# Altium PCB microcontroller.PcbDoc
Units mil, origin at the board's own origin, x right, y up, seen from the top; angles counter-clockwise.
Board outline 1890.03 x 2705.02 mil, 2 copper layers (Top Layer, Bottom Layer); 40 components, 47 nets, 161 pads, 31 vias.
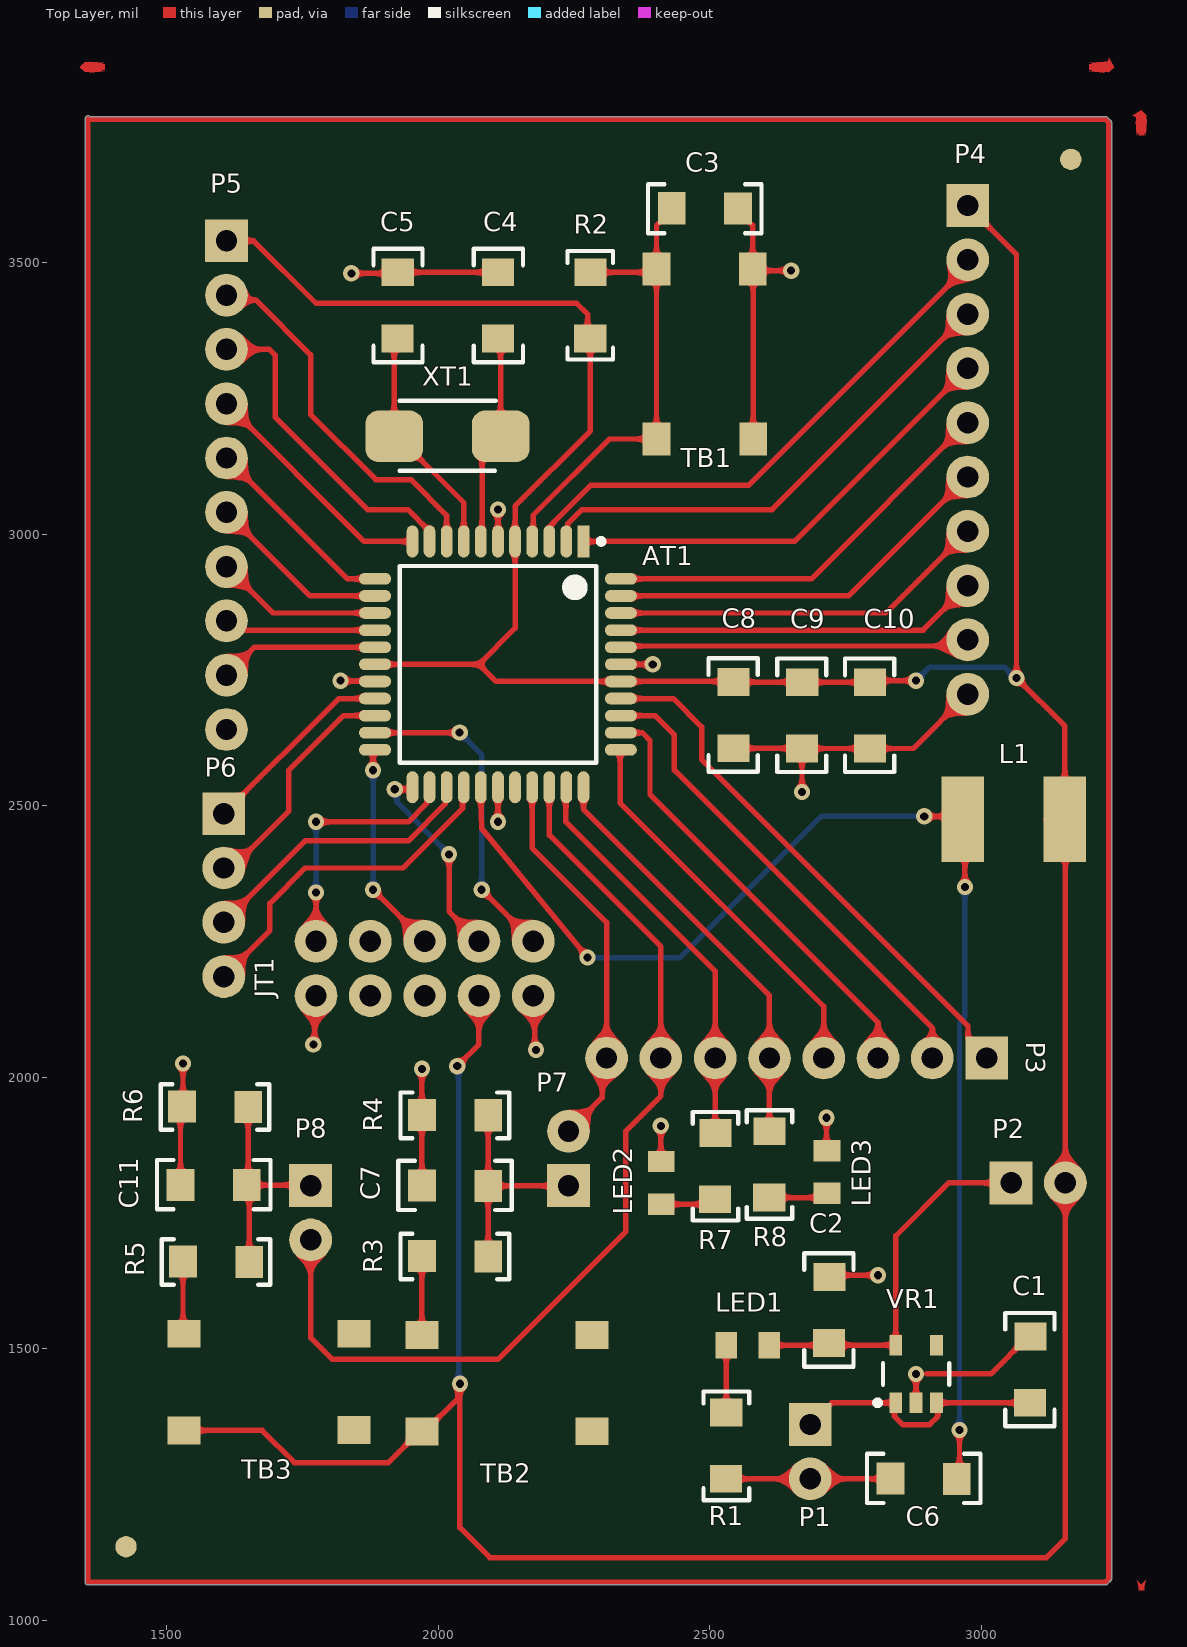
[diagram p0: Top Layer view]
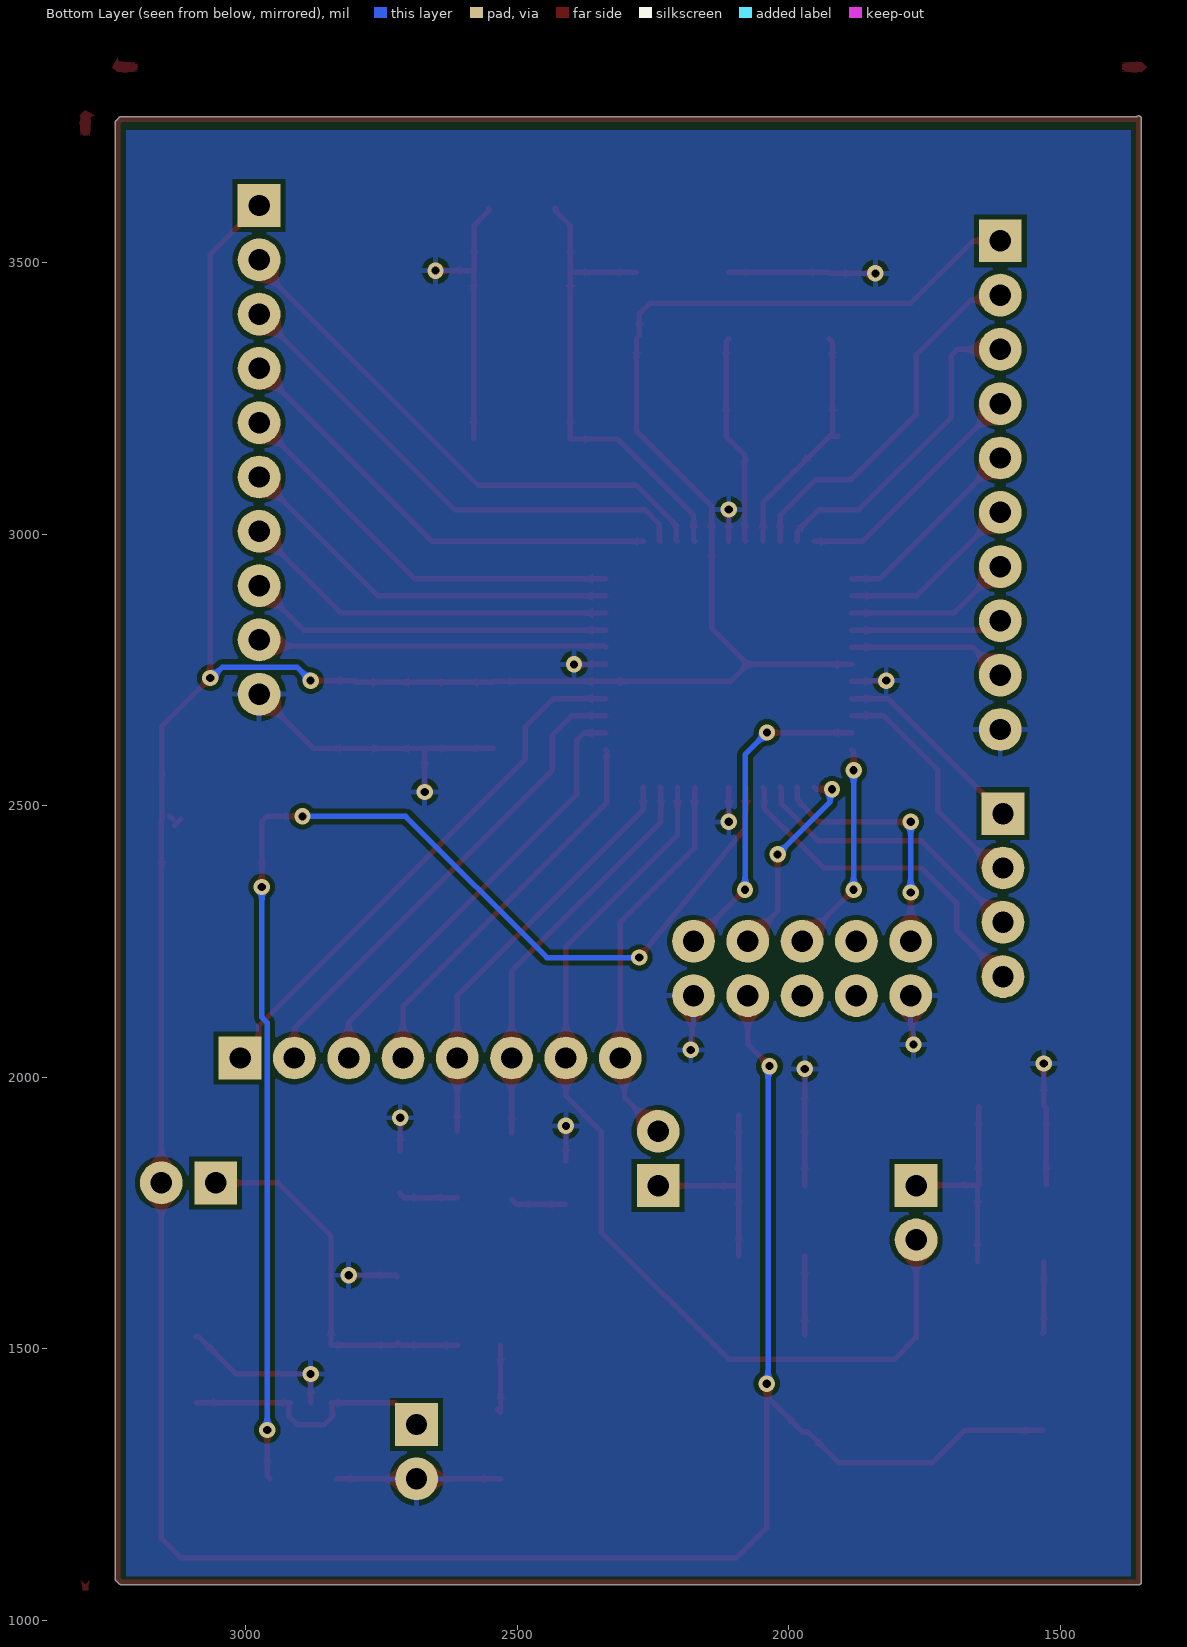
[diagram p1: Bottom Layer view, seen from below]

## Layer stack, top to bottom
Top Solder: solder mask 0.4, Solder Resist, Dk 3.5
Top Layer: signal copper 1.4
Dielectric 1: dielectric 12.6, FR-4, Dk 4.8
Bottom Layer: signal copper 1.4
Bottom Solder: solder mask 0.4, Solder Resist, Dk 3.5

## Board outline
1349.98,1070 1349.98,3765 cw(c1355,3765) 1358.55,3768.54 3229.14,3768.54 cw(c3229.14,3763.53) 3232.71,3767.06 3232.69,3767.08 3238.55,3761.22 3238.53,3761.23 cw(c3235,3757.67) 3240.01,3757.67 3240.01,1075.86 cw(c3235,1075.86) 3238.53,1072.29 3238.55,1072.31 3232.69,1066.45 3232.71,1066.47 cw(c3229.14,1070) 3229.14,1064.98 1355,1064.98 cw(c1355,1070)

## Design rules (kind name [scope] priority, off if disabled: settings)
Clearance [All] p1: gap=9 ignorepadtopadclearanceinfootprint=FALSE
ComponentClearance [All] p1: gap=10 collisioncheckmode=3 verticalgap=9 showdistances=FALSE
HoleToHoleClearance [All] p1: gap=9 allowstackedmicrovias=TRUE
MinimumSolderMaskSliver [All] p1: minsoldermaskwidth=1.5
PolygonConnect [All] p1: connectstyle=Relief reliefconductorwidth=10 reliefentries=4 polygonreliefangle="90 Angle" airgapwidth=10
RoutingVias [All] p1: holewidth=28 width=50 viastyle="Through Hole" minholewidth=28 minwidth=50 maxholewidth=28 maxwidth=50
SilkToSilkClearance [All] p1: silktosilkclearance=9
SilkToSolderMaskClearance [IsText] p1: minsilkscreentomaskgap=9 clearancetoexposedcopper=TRUE
SolderMaskExpansion [All] p1: expansion=4 istentingtop=FALSE
Width [All] p1: maxlimit=25 minlimit=10 preferedwidth=15
25 further rules are at their usual default settings.

## Components (designator, comment, footprint, x,y, rotation, side; value= is the part's Value field where it differs from the comment)
AT1 "ATmega644PA" TQFP-44 2110,2760 r270 top
C1 "1206, capacitor" "1206, capasitor" 3091.48,1544.61 r90 top value=100nF
C2 "1206, capacitor" "1206, capasitor" 2721.48,1654.61 r90 top value=10uF
C3 "1206, capacitor" "1206, capasitor" 2407.35,3601.04 r180 top value=100n
C4 "1206, capacitor" "1206, capasitor" 2108.96,3337.35 r270 top value=10-12p
C5 "1206, capacitor" "1206, capasitor" 1923.96,3337.35 r270 top value=10-12p
C6 "1206, capacitor" "1206, capasitor" 2977.65,1258.96 r0 top value=0
C7 "1206, capacitor" "1206, capasitor" 2114.61,1798.52 r0 top value=1uF
C8 "1206, capacitor" "1206, capasitor" 2545,2750 r90 top value=100n
C9 "1206, capacitor" "1206, capasitor" 2671.48,2749.61 r90 top value=100n
C10 "1206, capacitor" "1206, capasitor" 2796.48,2749.61 r90 top value=100n
C11 "1206, capacitor" "1206, capasitor" 1670,1800 r0 top value=1uF
JT1 "JTAG Connector" Atmel_JTAG 2176.08,2249.61 r180 top
L1 "Coil" "1812, coil" 3060,2475 r180 top value=0
LED1 "0805, LED" 0805_led 2570,1505 r0 top value="0805 LED"
LED2 "0805, LED" 0805_led 2410,1805 r270 top value="0805 LED"
LED3 "0805, LED" 0805_led 2715,1825 r270 top value="0805 LED"
P1 "1x2 Pin Header" 1x2HEADER 2685,1360 r0 top
P2 "1x2 Pin Header" 1x2HEADER 3055,1805 r90 top
P3 "1x8 Pin Header" 1x8HEADER 3010,2035 r270 top value="1x2 Pin Header"
P4 "1x10 Pin Header" 1x10HEADER 2975,3605 r0 top value="1x2 Pin Header"
P5 "1x10 Pin Header" 1x10HEADER 1610,3540 r0 top value="1x2 Pin Header"
P6 "1x4 Pin Header" 1x4HEADER 1605,2485 r0 top value="1x2 Pin Header"
P7 "1x2 Pin Header" 1x2HEADER 2240,1800 r180 top
P8 "1x2 Pin Header" 1x2HEADER 1765,1800 r0 top
R1 "1206, resistor" 1206 2530.56,1248.72 r270 top value=0
R2 "1206, resistor" 1206 2279.88,3493.23 r90 top value=10k
R3 "1206, resistor" 1206 1958.72,1669.44 r180 top value=1k
R4 "1206, resistor" 1206 1958.72,1929.44 r180 top value=1k
R5 "1206, resistor" 1206 1518.72,1659.44 r180 top value=1K
R6 "1206, resistor" 1206 1516.77,1944.88 r180 top value=1k
R7 "1206, resistor" 1206 2510.56,1763.72 r270 top value=1.2k
R8 "1206, resistor" 1206 2610.12,1766.77 r270 top value=1.2k
TB1 "Tactile Button" "Button smd" 2579.11,3487.99 r270 top value="Button SMD"
TB2 "Tactile Button" "Button smd" 2282.99,1347.83 r180 top value="Button SMD"
TB3 "Tactile Button" "Button smd" 1845,1350 r180 top value="Button SMD"
VR1 "3.3V Reg" SOT23-5 2880,1453.15 r90 top value=TPS79333DBVR
XT1 "XTAL TXC 7A" XTAL_SMD_LP 2115.79,3180 r180 top value=Crystal
? "Comment" FIDUCIAL 1425,1135 r0 top
? "Comment" FIDUCIAL 3165,3690 r0 top

## Footprints (in the part's own frame and the unit in brackets; to place one, negate y for a bottom-side part, rotate by r counter-clockwise, add the part's x,y. Pads: shape width x height; smd on the part's side, far side on the other; paste and mask are expansions set on the pad)
1x2HEADER [mm] "Pad Diameter 2 mm, Hole  1 mm, Pitch 2.54 mm"
  rect 2x2 hole 1: 1(0,0)
  round 2 hole 1: 2(0,-2.54)
  body extent -1.27,-3.81 1.27,1.27, height 5.94
1x4HEADER [mm] "Pad Diameter 2 mm, Hole  1 mm, Pitch 2.54 mm"
  rect 2x2 hole 1: 1(0,0)
  round 2 hole 1: 2(0,-2.54) 3(0,-5.08) 4(0,-7.62)
  body extent -1.27,-8.89 1.27,1.27, height 5.94
1x8HEADER [mm] "Pad Diameter 2 mm, Hole  1 mm, Pitch 2.54 mm"
  rect 2x2 hole 1: 1(0,0)
  round 2 hole 1: 2(0,-2.54) 3(0,-5.08) 4(0,-7.62) 5(0,-10.16) 6(0,-12.7) 7(0,-15.24) 8(0,-17.78)
  body extent -1.27,-19.05 1.27,1.27, height 5.94
1x10HEADER [mm] "Pad Diameter 2 mm, Hole  1 mm, Pitch 2.54 mm"
  rect 2x2 hole 1: 1(0,0)
  round 2 hole 1: 2(0,-2.54) 3(0,-5.08) 4(0,-7.62) 5(0,-10.16) 6(0,-12.7) 7(0,-15.24) 8(0,-17.78) 9(0,-20.32) 10(0,-22.86)
  body extent -1.27,-24.13 1.27,1.27, height 5.94
0805_led [mm]
  rect 1x1.25 smd: 0(-1,0.025) 1(1,0.025)
  body extent -1.03,-0.6 0.99,0.65, height 1.1
1206 [mm] "Generic 1206"
  rect 1.3x1.5 smd: 0(-3.384,-0.003) 1(-0.286,-0.014)
  silkscreen extent -4.37,-1.07 0.71,1.07, body extent -3.46,-0.79 -0.26,0.81
"1206, capasitor" [mm] "Generic 1206"
  rect 1.3x1.5 smd: 0(-3.673,0.037) 1(-0.575,0.027)
  silkscreen extent -4.78,-1.1 0.53,1.2, body extent -3.78,-0.79 -0.58,0.81
"1812, coil" [mm]
  rect 2x4 smd: 1(-2.385,0) 2(2.385,0)
  body extent -2.3,-1.6 2.3,1.6, height 2.6
Atmel_JTAG [mm]
  round 2 hole 1: 1(0.028,-0.01) 2(0.028,2.53) 3(2.568,-0.01) 4(2.568,2.53) 5(5.108,-0.01) 6(5.108,2.53) 7(7.648,-0.01) 8(7.648,2.53) 9(10.188,-0.01) 10(10.188,2.53)
  body extent -1.15,-1.36 11.55,3.64, height 8.6
"Button smd" [mm]
  rect 1.55x1.3 smd: 1(0,0) 2(0,-4.5) 3(7.95,0.023) 4(7.95,-4.5)
  body extent -0.55,-5.25 8.45,0.75, height 4.3
FIDUCIAL [mm] "FIDUCIAL 1mm SOLDER MASK 2mm KEEP OUT 2mm"
  round 1 smd mask+0.5: 0(0,0)
SOT23-5 [mm] "SOT23, 5-Leads, Body 2,90x2,80mm, Pitch 0,95mm, IPC Medium Density"
  rect 0.95x0.6 smd: 1(-1.35,0.95) 2(-1.35,0) 3(-1.35,-0.95) 4(1.35,-0.95) 5(1.35,0.95)
  silkscreen extent -1.47,-1.55 0.5,1.92, body extent -1.25,-1.5 1.25,1.5, height 1.1
TQFP-44 [mm] "QFP, 44-Leads, Body 10,00x10,00mm, Pitch 0,80mm, IPC Medium Density"
  rect 1.5x0.55 smd: 1(-5.75,4)
  oval 1.5x0.55 smd: 2(-5.75,3.2) 3(-5.75,2.4) 4(-5.75,1.6) 5(-5.75,0.8) 6(-5.75,0) 7(-5.75,-0.8) 8(-5.75,-1.6) 9(-5.75,-2.4) 10(-5.75,-3.2) 11(-5.75,-4) 23(5.75,-4) 24(5.75,-3.2) 25(5.75,-2.4) 26(5.75,-1.6) 27(5.75,-0.8) 28(5.75,0) 29(5.75,0.8) 30(5.75,1.6) 31(5.75,2.4) 32(5.75,3.2) 33(5.75,4)
  oval 0.55x1.5 smd: 12(-4,-5.75) 13(-3.2,-5.75) 14(-2.4,-5.75) 15(-1.6,-5.75) 16(-0.8,-5.75) 17(0,-5.75) 18(0.8,-5.75) 19(1.6,-5.75) 20(2.4,-5.75) 21(3.2,-5.75) 22(4,-5.75) 34(4,5.75) 35(3.2,5.75) 36(2.4,5.75) 37(1.6,5.75) 38(0.8,5.75) 39(0,5.75) 40(-0.8,5.75) 41(-1.6,5.75) 42(-2.4,5.75) 43(-3.2,5.75) 44(-4,5.75)
  silkscreen extent -5.87,-4.6 4.6,4.95, body extent -6,-6 6,6, height 1.1
XTAL_SMD_LP [mm] "Pad 1.7x2.4, Pitch 3.7"
  rrect50% 2.7x2.4 smd: 1(0.02,0) 2(5,0)
  silkscreen extent 0.25,-1.66 4.76,1.62, body extent 0.02,-1.6 5.02,1.6, height 1.35

## Part data
AT1: "ATmega644PA - Small but big and PicoPower", Farnell=2484915
JT1: library part "Atmel JTAG", "Atmel JTAG Connector"
P1 P2 P3 P4 P5 P6 P7 P8: "2.54 mm, TH"
R1 R2 R3 R4 R5 R6 R7 R8: "Resistor"
  R2: Digikey=RNCP1206FTD10K0CT-ND
TB1 TB2 TB3: library part "Button SMD", "Tactile Switch Small Low", ELFA=110-87-406
  TB1: Digikey=732-7003-1-ND
VR1: library part TPS79333DBR, "3.3V Reg, Ultra-Low Noise, 200 mA", Input Voltage="Vin 6V (max)", Drop Out=102mV, Farnell=1287689
XT1: "16 MHz, SMD, 5mm x 3,2mm, 30 ppm", Digikey=887-1086-2-ND, Farnell=1841946
C3 C8 C9 C10: Digikey=1276-1017-1-ND
C4 C5: Digikey=1276-1083-2-ND

## Via types
v1: diameter 30, hole 15, Top Layer to Bottom Layer, 31 vias

## Nets (pads, with @x,y where several pads share a name; then routed paths per layer and width w, separated by ;. In a path a pad name is that pad's centre, name@x,y a point inside that pad or via, vN(x,y) a via of type N, cw(c..) or ccw(c..) an arc to the next point about the centre after c; other vN are vias at no path point)
3V3: AT1.5 AT1.17 AT1.38 C8.1 C9.1 C10.1 JT1.4 L1.1 P2.2 P4.1 P5.1 R2.0 TB2.3 TB3.3 | length 7996.4
  Top Layer w10: TB3.3 1675.89,1349.11 1735,1290 1908.13,1290 1965.08,1346.95 TB2.3 1974.92,1346.95 2036.17,1408.2 2036.17,1431.17 v1(2040,1435) 2040,1170 2095,1115 3120,1115 3155,1150 P2.2 3155,2473.9 L1.1 3153.9,2646.1 v1(3065,2735) 3065,3515 P4.1 P4.1@2970,3600 ; P5.1 1660,3540 1775,3425 2255,3425 2275,3405 2275,3365 R2.0 2280,3190 2141.5,3051.5 AT1.5 2141.5,2826.5 2075,2760 ; AT1.17 2075,2760 ; v1(2035,2020) 2075,2060 JT1.4 ; v1(2880,2730) 2798.48,2730 C10.1 C9.1 2670.04,2727.35 C8.1 2542.8,2728.5 AT1.38 2106.5,2728.5 2075,2760 ; L1.1@3118.9,2475 L1.1@3130,2463.9 ; L1.1@3133.9,2475 L1.1@3140,2481.1
  Bottom Layer w10: v1(2035,2020) 2037.5,2017.5 2037.5,1437.5 v1(2040,1435) ; v1(2880,2730) 2905,2755 3042.57,2755 3062.57,2735 v1(3065,2735) v1@3062.5,2732.5 ; P4.1@2970,3600 P4.1
GND: AT1.6 AT1.18 AT1.28 AT1.39 C1.1 C2.1 C3.0 C4.0 C5.0 C6.0 C7.0 C8.0 C9.0 C10.0 C11.0 JT1.2 JT1.10 LED2.0 LED3.0 P1.2 P4.10 P5.10 R1.1 R4.1 R6.1 TB1.1 TB1.3 VR1.2 | length 3005.3
  Top Layer w10: C11.0 1525.39,1942.78 R6.1 1530,1947.39 v1(1530,2025) ; v1(1770,2060) 1772.5,2062.5 1772.5,2147.5 JT1.10 JT1.10@1775.75,2149.25 ; v1(1820,2730) 1820.75,2729.25 1882.87,2729.25 AT1.18 ; v1(1840,3480) 1923.48,3480 C5.0 C4.0 ; C7.0 R4.1 v1(1970,2015) ; v1(2110,2470) AT1.28 ; AT1.6 v1(2110,3045) ; JT1.2 2177.5,2147.5 2177.5,2052.5 v1(2180,2050) ; AT1.39 v1(2395,2760) ; v1(2410,1910) 2410,1845.36 LED2.0 ; R1.1 P1.2 2832.61,1260 C6.0 ; C8.0 2669.61,2605.39 C9.0 ; C3.0 2551.96,3595.63 2579.11,3568.47 TB1.1 TB1.1@2580,3487.11 ; TB1.3 TB1.1@2580,3487.11 ; v1(2650,3485) 2582.11,3485 TB1.1@2580,3487.11 ; v1(2670,2525) C9.0 ; v1(2715,1925) 2715,1865.36 LED3.0 ; C2.1 2723.48,1635 v1(2810,1635) ; VR1.2 v1(2880,1453.15) ; 2900,1453.15 3017.69,1453.15 3086.49,1521.96 C1.1 ; P4.10 2875,2605 C10.0 C9.0
NetAT1_27: AT1.27 C6.1 L1.2 | length 2407.1
  Top Layer w10: AT1.27 2078.5,2514.92 2080,2457.57 v1(2275,2220) ; v1(2895,2480) 2961.1,2480 L1.2 2970,2471.1 v1(2970,2350) ; C6.1 2960,1265 v1(2960,1350)
  Bottom Layer w10: v1(2275,2220) 2445,2220 2705,2480 v1(2895,2480) ; v1(2960,1350) 2960,2100 2970,2110 v1(2970,2350)
NetC1_0: C1.0 P1.1 VR1.1 VR1.3 | length 491.3
  Top Layer w10: P1.1 2725,1400 VR1.1 2840,1397.4 2840,1375 2855,1360 2905,1360 2920,1375 2920,1397.4 VR1.3 C1.0
NetC2_0: C2.0 LED1.1 P2.1 VR1.5 | length 691.3
  Top Layer w10: LED1.1 2714.02,1505.98 2719.02,1510.98 C2.0 2723.7,1506.3 VR1.5 2842.6,1707.6 2940,1805 P2.1
NetC7_1: C7.1 P7.1 R3.0 R4.0 | length 408.2
  Top Layer w10: R3.0 C7.1 ; R4.0 C7.1 ; P7.1 2239.57,1799.57 C7.1
NetC11_1: C11.1 P8.1 R5.0 R6.0 | length 406.5
  Top Layer w10: R6.0 1650,1803.7 C11.1 ; R5.0 1651.96,1796.43 C11.1 ; P8.1 1763.96,1801.04 C11.1
NetLED1_0: LED1.0 R1.0 | length 132.1
  Top Layer w10: LED1.0 2530.43,1505.79 R1.0 R1.0@2536.06,1387.58
NetLED2_1: LED2.1 R7.1 | length 102.9
  Top Layer w10: LED2.1 2500.64,1765.64 R7.1
NetLED3_1: LED3.1 R8.1 | length 109.6
  Top Layer w10: R8.1 2708.38,1778.04 LED3.1
NetR3_1: R3.1 TB2.4 | length 145
  Top Layer w10: TB2.4 R3.1
NetR5_1: R5.1 TB3.4 | length 133.7
  Top Layer w10: R5.1 1530,1529.17 TB3.4
PA0: AT1.37 P3.1 | length 997.6
  Top Layer w10: AT1.37 2432.99,2697.01 2485,2645 2485,2585 2975.63,2094.37 2975.63,2069.37 P3.1
PA1: AT1.36 P3.2 | length 905.1
  Top Layer w10: AT1.36 2384.49,2665.51 2385,2665 2400,2665 2435,2630 2435,2565 2910,2090 P3.2
PA2: AT1.35 P3.3 | length 818.4
  Top Layer w10: AT1.35 2375.98,2634.02 2390,2620 2390,2520 2810,2100 P3.3
PA3: AT1.34 P3.4 | length 723.4
  Top Layer w10: AT1.34 2335,2601.14 2335,2505 2710,2130 P3.4
PA4: AT1.33 P3.5 R8.0 | length 775.5
  Top Layer w10: AT1.33 2267.48,2492.52 2610,2150 P3.5 R8.0
PA5: AT1.32 P3.6 R7.0 | length 751.2
  Top Layer w10: AT1.32 2235,2532.64 2235,2470 2510,2195 P3.6 2510,1897.39 R7.0
PA6: AT1.31 P3.7 P8.2 | length 1804.6
  Top Layer w10: P8.2 1765,1520 1805,1480 2110,1480 2345,1715 2345,1900 2410,1965 P3.7 2410,2240 2204.49,2445.51 AT1.31
PA7: AT1.30 P3.8 P7.2 | length 719.4
  Top Layer w10: AT1.30 2172.99,2422.01 2310,2285 P3.8 2302.03,2027.03 2302.03,1962.03 P7.2
PB0: AT1.40 P4.9 | length 644.2
  Top Layer w10: AT1.40 2338.61,2793.73 2963.73,2793.73 P4.9
PB1: AT1.41 P4.8 | length 672.6
  Top Layer w10: AT1.41 2892.99,2822.99 P4.8
PB2: AT1.42 P4.7 | length 701
  Top Layer w10: AT1.42 2824.49,2854.49 P4.7
PB3: AT1.43 P4.6 | length 729.3
  Top Layer w10: AT1.43 2755.98,2885.98 P4.6
PB4: AT1.44 P4.5 | length 757.7
  Top Layer w10: AT1.44 2687.48,2917.48 P4.5
PB5: AT1.1 P4.4 | length 839.5
  Top Layer w10: AT1.1 2656.38,2986.38 P4.4
PB6: AT1.2 P4.3 | length 930
  Top Layer w10: AT1.2 2238.21,2988.61 2238.21,3018.68 2264.53,3045 2615,3045 P4.3
PB7: AT1.3 P4.2 | length 1008.3
  Top Layer w10: AT1.3 2206.72,2988.61 2206.72,3015.47 2281.25,3090 2572.32,3090 2975,3492.68 P4.2
PC0: AT1.19 P6.1 | length 366.4
  Top Layer w10: P6.1 1817.01,2697.01 AT1.19
PC1: AT1.20 P6.2 | length 438.7
  Top Layer w10: P6.2 1620,2385 1725,2490 1725,2565 1825.51,2665.51 AT1.20
PC6: AT1.25 P6.3 | length 530
  Top Layer w10: P6.3 1755,2435 1945,2435 2013.28,2503.28 2013.28,2531.39 AT1.25
PC7: AT1.26 P6.4 | length 637.1
  Top Layer w10: P6.4 1690,2270 1690,2320 1755,2385 1935,2385 2044.78,2494.78 2044.78,2531.39 AT1.26
PD0: AT1.9 P5.2 | length 686
  Top Layer w10: P5.2 1619.37,3430.63 1664.37,3430.63 1765,3330 1765,3220 1885,3100 1950,3100 2015.51,3034.49 AT1.9
PD1: AT1.10 P5.3 | length 598.3
  Top Layer w10: P5.3 1689.14,3340 1700,3329.14 1700,3215 1870,3045 1944.09,3045 1984.02,3005.08 AT1.10
PD2: AT1.11 P5.4 | length 447.6
  Top Layer w10: P5.4 1863.62,2986.38 AT1.11
PD3: AT1.12 P5.5 | length 365.8
  Top Layer w10: P5.5 1832.52,2917.48 AT1.12
PD4: AT1.13 P5.6 | length 337.4
  Top Layer w10: P5.6 1764.02,2885.98 AT1.13
PD5: AT1.14 P5.7 | length 309
  Top Layer w10: P5.7 1695.51,2854.49 AT1.14
PD6: AT1.15 P5.8 | length 280.7
  Top Layer w10: P5.8 1628.6,2840 1645.61,2822.99 AT1.15
PD7: AT1.16 P5.9 | length 295
  Top Layer w10: P5.9 1661.5,2791.5 AT1.16
RESET: AT1.4 C3.1 R2.1 TB1.2 TB1.4 | length 896.6
  Top Layer w10: AT1.4 2175,2988.39 2175,3035 2315,3175 TB1.4 TB1.2 ; R2.1 2395.91,3481.96 TB1.2 ; C3.1@2428.9,3598.9 C3.1 2430,3596.06 2401.95,3568.01 TB1.2
TCK: AT1.21 JT1.1 | length 597.4
  Top Layer w10: AT1.21 2039.02,2634.02 v1(2039.51,2634.51) v1@2040,2635 ; v1(2080,2345) JT1.1
  Bottom Layer w10: v1(2039.51,2634.51) 2080,2594.02 v1(2080,2345)
TDI: AT1.24 JT1.9 | length 469.8
  Top Layer w10: JT1.9 v1(1775,2340) ; v1(1775,2470) 1945,2470 1978.35,2503.35 1978.35,2506.1 1984.02,2511.77 AT1.24
  Bottom Layer w10: v1(1775,2340) v1(1775,2470)
TDO: AT1.23 JT1.3 | length 378.2
  Top Layer w10: v1(1920,2530) 1948.9,2530 AT1.23 ; v1(2020,2410) 2020,2305 JT1.3
  Bottom Layer w10: v1(1920,2530) 1923.83,2526.17 1923.83,2506.17 v1(2020,2410)
TMS: AT1.22 JT1.5 | length 393.4
  Top Layer w10: v1(1880,2345) JT1.5 ; v1(1880,2565) 1880,2598.9 AT1.22
  Bottom Layer w10: v1(1880,2345) v1(1880,2565)
XTAL1: AT1.8 C5.1 XT1.2 | length 438.5
  Top Layer w10: XT1.2@1908.94,3180 XT1.2@1914.84,3180 ; C5.1 1918.94,3353.94 XT1.2 1924.84,3180 2047.01,3057.83 AT1.8
XTAL2: AT1.7 C4.1 XT1.1 | length 390.8
  Top Layer w10: AT1.7 2080.73,2988.61 2080.73,3145.73 XT1.1 2115,3355 C4.1
pads on no net: ?.0 AT1.29 JT1.6 JT1.7 JT1.8 TB2.1 TB2.2 TB3.1 TB3.2 VR1.4
copper on no net: | length 9142.3
  Top Layer w10: 1355,1070 3229.14,1070 3235,1075.86 3235,3757.67 3229.14,3763.53 1356.47,3763.53 1355,3765 1355,1070

## Polygon pours and split planes (outlines as drawn)
GND on Bottom Layer "GND_L02_P002" (solid, pour order 2): 1370,3743.56 1370,1080.86 3220,1080.86 3220,3743.56

## Dimensions
3255,3775 to 3295,1065 on Top Layer
1345,3870 to 3240,3920 on Top Layer